# Altium PCB PCB2.PcbDoc
Units mm, origin at the board's own origin, x right, y up, seen from the top; angles counter-clockwise.
Board outline 70 x 58 mm, 2 copper layers (Top Layer, Bottom Layer); 36 components, 26 nets, 142 pads, 138 vias.
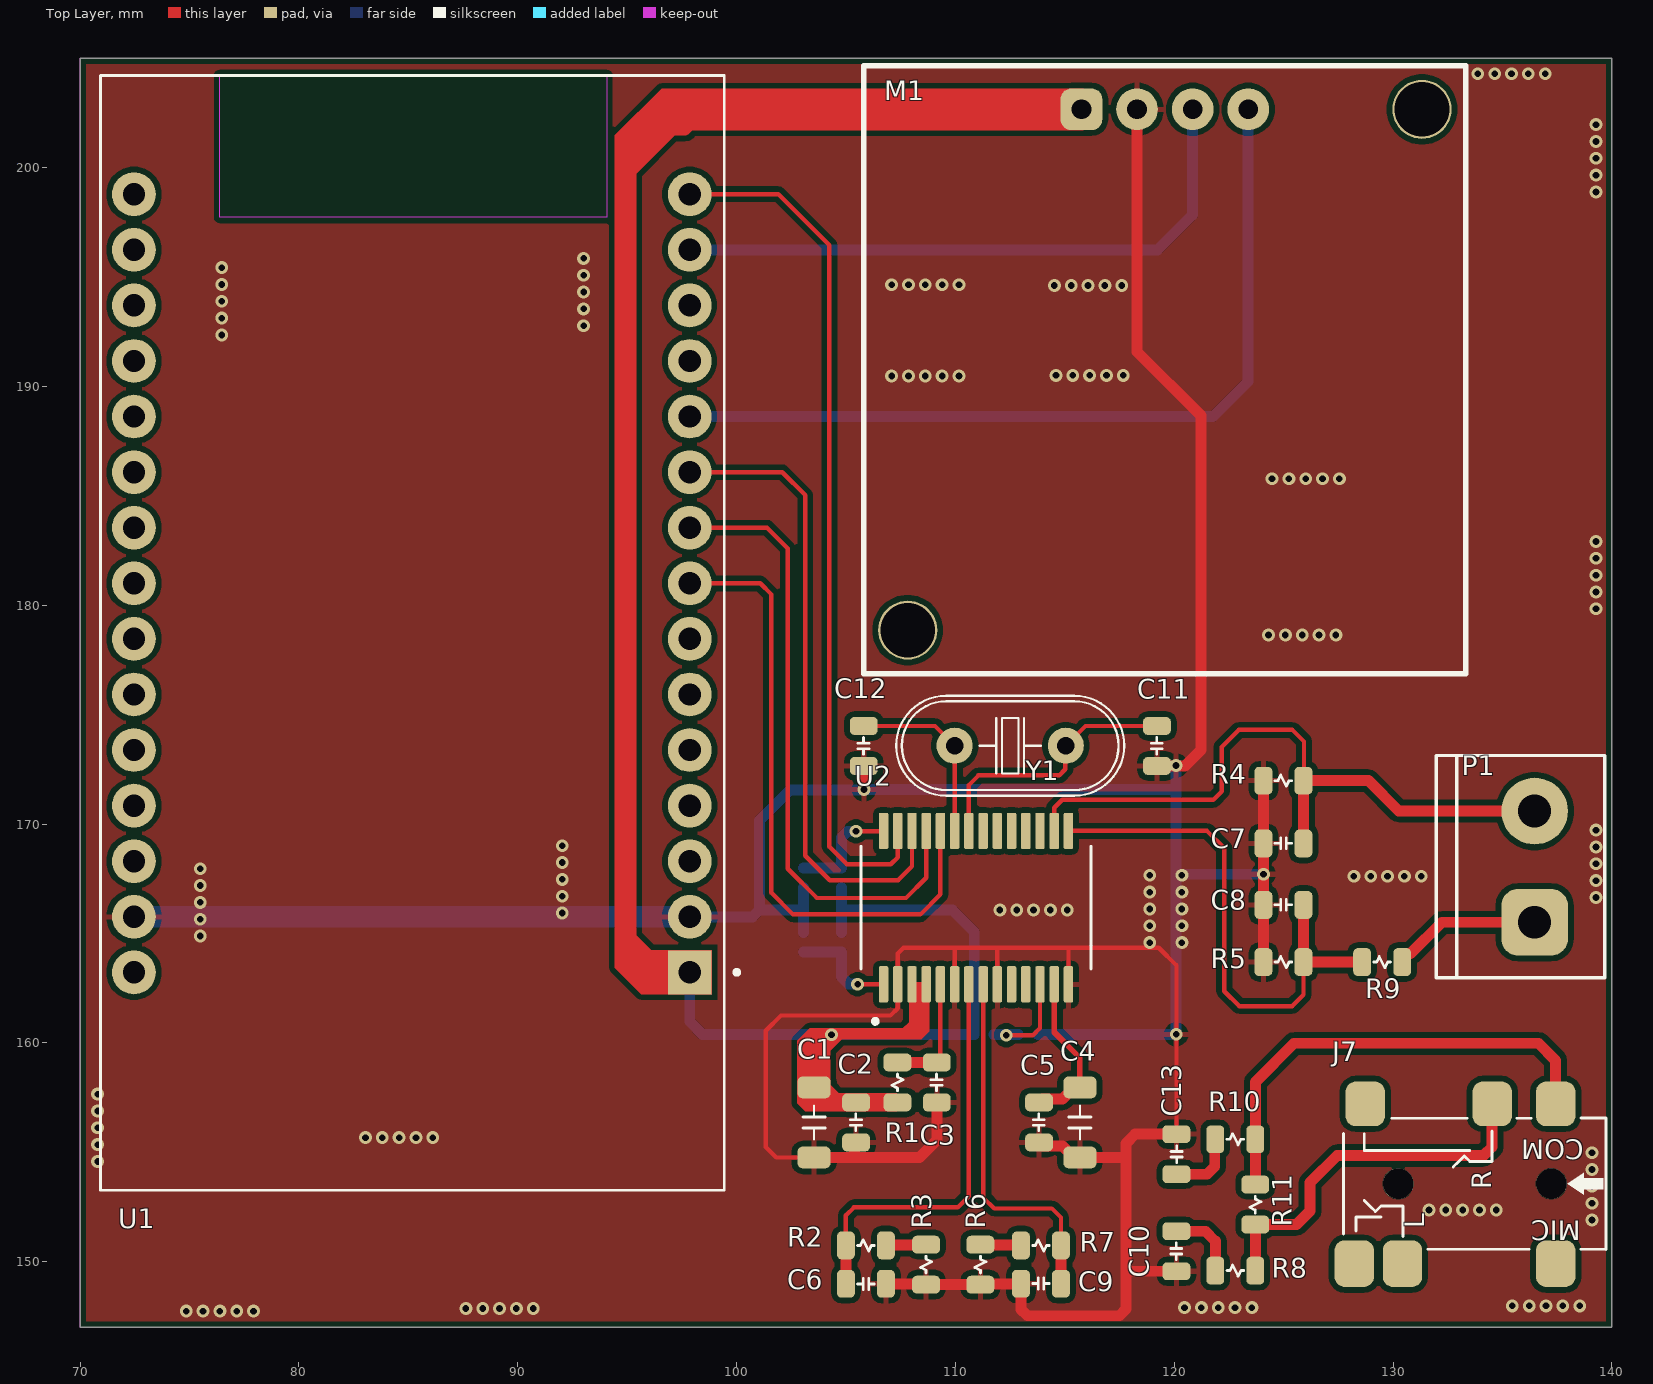
[diagram p0: Top Layer view]
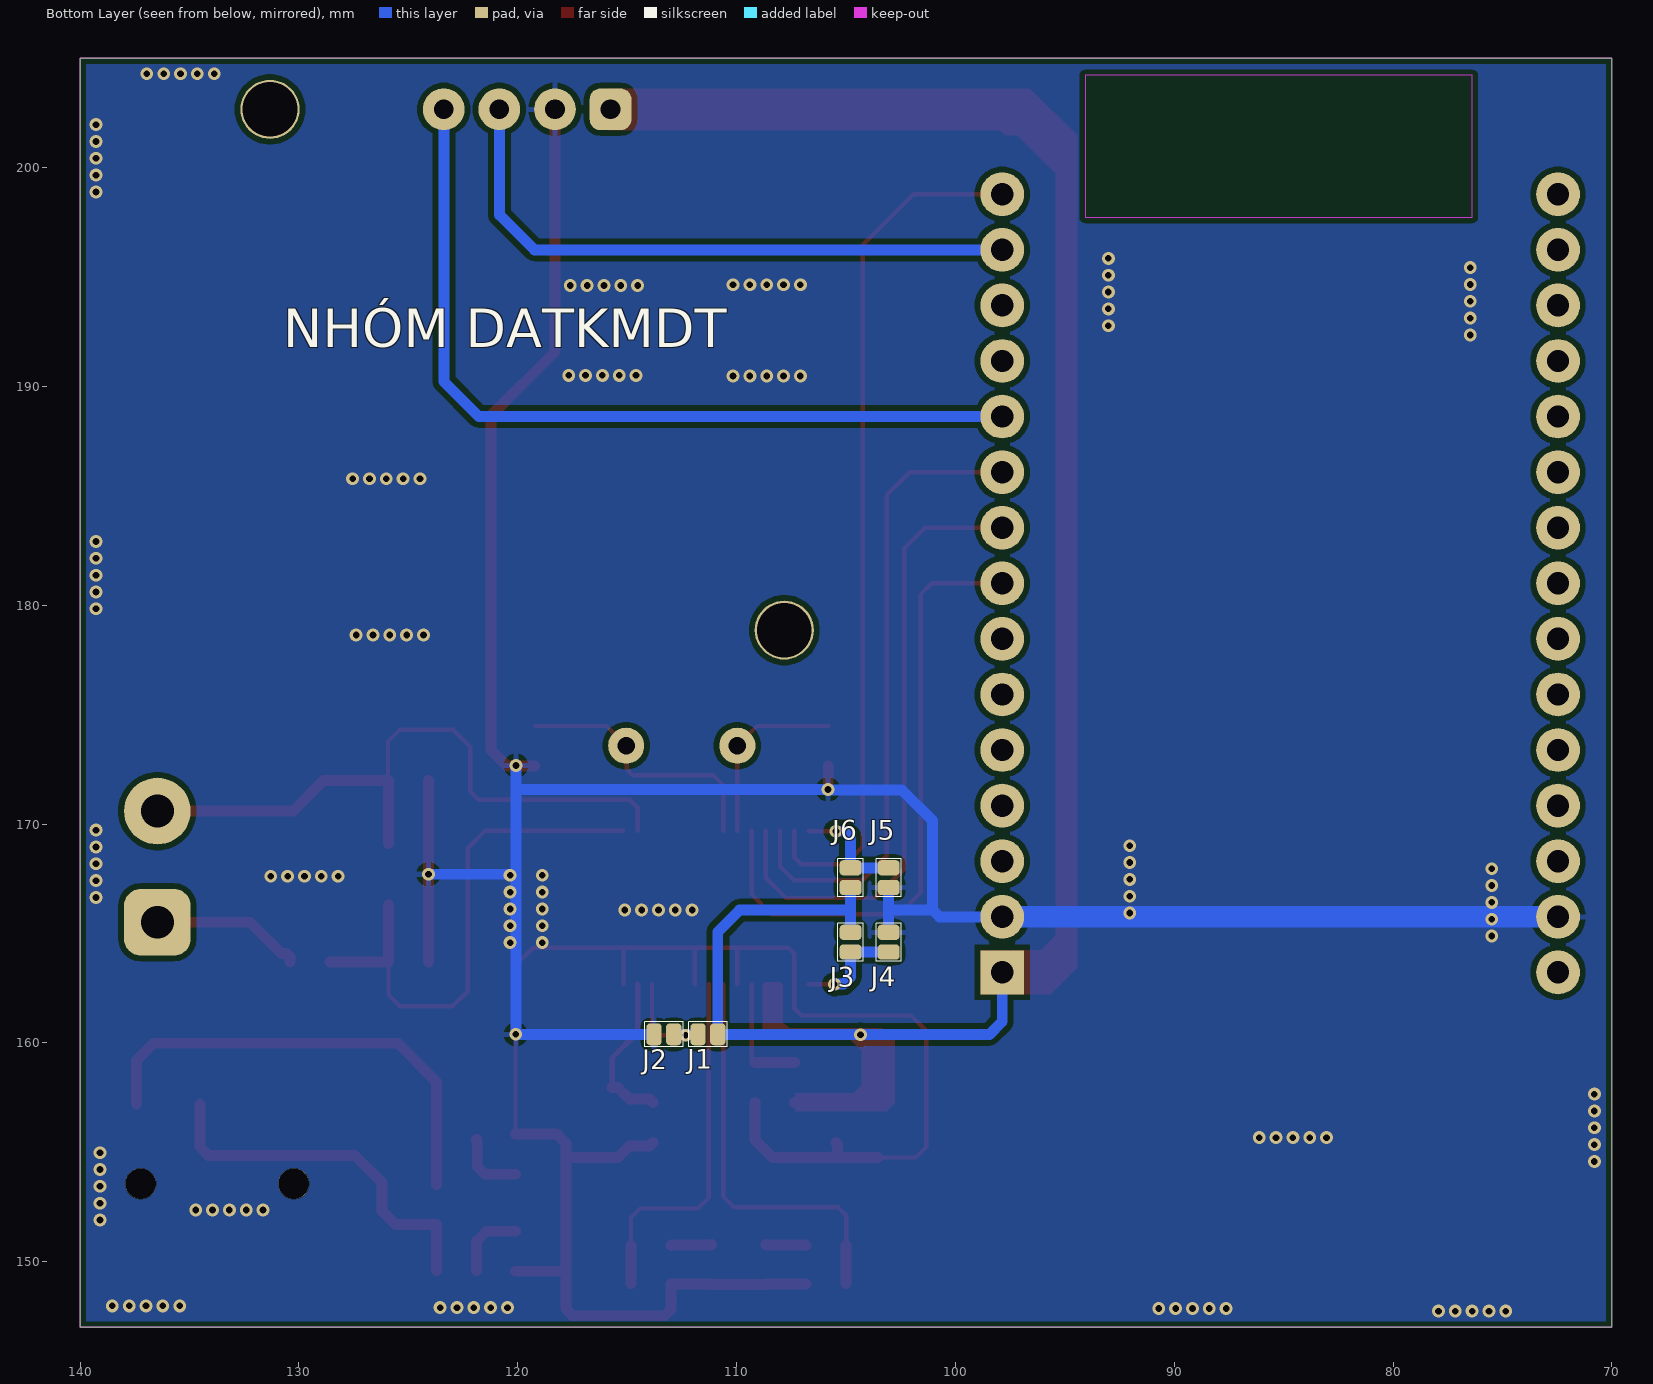
[diagram p1: Bottom Layer view, seen from below]
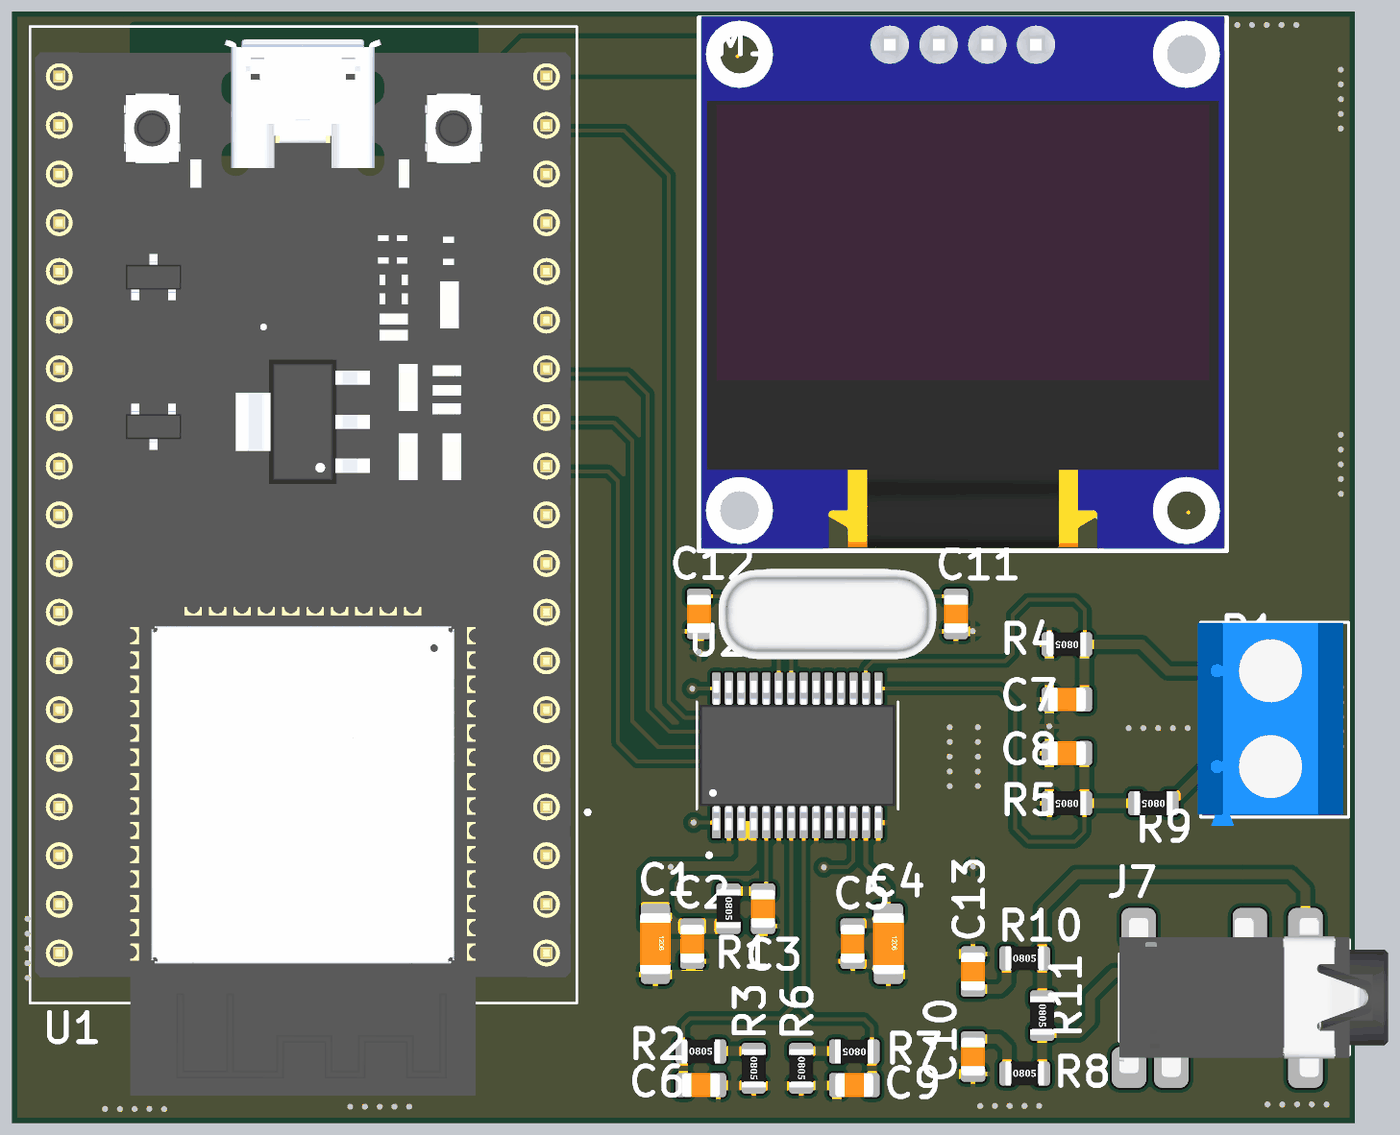
[diagram p2: 3D render of the assembled board from above, using the file's embedded part models]

## Layer stack, top to bottom
Top Solder: solder mask 0.0102, Solder Resist, Dk 3.5
Top Layer: signal copper 0.0356
Dielectric 1: dielectric 0.32, FR-4, Dk 4.8
Bottom Layer: signal copper 0.0356
Bottom Solder: solder mask 0.0102, Solder Resist, Dk 3.5

## Board outline
70,147 140,147 140,205 72,205 71.999,205.001 69.999,205.001 70,205

## Design rules (kind name [scope] priority, off if disabled: settings)
Clearance [All] p1: gap=0.254 ignorepadtopadclearanceinfootprint=FALSE except(0: Arc-Hole Track-Hole SMDPad-Hole THPad-Hole Via-Hole Fill-Hole Poly-Hole Region-Hole Text-Hole)
PolygonConnect [All] p1: connectstyle=Relief reliefconductorwidth=0.254 reliefentries=4 polygonreliefangle="90 Angle" airgapwidth=0.254
RoutingVias [All] p1: holewidth=0.711 width=1.27 viastyle="Through Hole" minholewidth=0.711 minwidth=1.27 maxholewidth=0.711 maxwidth=1.27
SolderMaskExpansion [All] p1: expansion=0.102 istentingtop=FALSE
Width [All] p1: maxlimit=1 minlimit=0.2 preferedwidth=0.5
30 further rules are at their usual default settings.

## Components (designator, comment, footprint, x,y, rotation, side; value= is the part's Value field where it differs from the comment)
C1 "106" CAP-1206 103.54,156.361 r270 top value="106/10V 1206"
C2 "104" CAP-0805 105.46,156.361 r270 top value=C0805
C3 "104" CAP-0805 109.15,158.19 r270 top value=C0805
C4 "106" CAP-1206 115.69,156.361 r270 top value="106/10V 1206"
C5 "104" CAP-0805 113.82,156.361 r270 top value=C0805
C6 "33nF" CAP-0805 105.91,148.99 r0 top value=C0805
C7 "33nF" CAP-0805 124.99,169.11 r180 top value=C0805
C8 "33nF" CAP-0805 124.99,166.3 r180 top value=C0805
C9 "33nF" CAP-0805 113.91,148.99 r180 top value=C0805
C10 "330nF" CAP-0805 120.1,150.476 r270 top value=C0805
C11 "27pF" CAP-0805 119.21,173.566 r270 top value=C0805
C12 "27pF" CAP-0805 105.81,173.566 r270 top value=C0805
C13 "330nF" CAP-0805 120.1,154.91 r90 top value=C0805
J1 "PAD_CD" PAD_CD 111.76,160.39 r180 bottom
J2 "PAD_CD" PAD_CD 113.77,160.39 r180 bottom
J3 "PAD_CD" PAD_CD 104.791,164.15 r90 bottom
J4 "PAD_CD" PAD_CD 103.05,165.048 r270 bottom
J5 "PAD_CD" PAD_CD 103.052,167.098 r90 bottom
J6 "PAD_CD" PAD_CD 104.791,167.098 r90 bottom
J7 "PJ342" PJ-342 139.73,153.56 r90 top
M1 "OLED" "OLED 0.96 I2C" 119.57,190.76 r0 top
P1 "KF301-2P" KF301-2P 136.47,168.05 r90 top
R1 "0R" R-0805 107.35,158.19 r270 top value="R 0805"
R2 "1K" R-0805 105.91,150.74 r0 top value="R 0805"
R3 "2.4R" R-0805 108.66,149.864 r270 top value="R 0805"
R4 "1K" R-0805 124.99,171.98 r180 top value="R 0805"
R5 "1K" R-0805 124.99,163.69 r180 top value="R 0805"
R6 "2.4R" R-0805 111.14,149.864 r270 top value="R 0805"
R7 "1K" R-0805 113.91,150.74 r180 top value="R 0805"
R8 "100R" R-0805 122.79,149.59 r0 top value="R 0805"
R9 "100K" R-0805 129.5,163.69 r180 top value="R 0805"
R10 "100R" R-0805 122.79,155.59 r0 top value="R 0805"
R11 "1M" R-0805 123.704,152.61 r270 top value="R 0805"
U1 "DEVKIT_V1_ESP32-WROOM-32" MODULE_DEVKIT_V1_ESP32-WROOM-32 85.16,178.735 r180 top
U2 "ATM90E26-YU-R" SOP65P780X200-28N 110.94,166.18 r90 top
Y1 "8.192MHz" CRYSTAL-49S 112.505,173.58 r180 top value="Crystal 49S"

## Footprints (in the part's own frame and the unit in brackets; to place one, negate y for a bottom-side part, rotate by r counter-clockwise, add the part's x,y. Pads: shape width x height; smd on the part's side, far side on the other; paste and mask are expansions set on the pad)
CAP-0805 [mil] "SMDCHIP - Size"
  rrect50% 32x50 smd: 1(-36,0) 2(36,0)
  silkscreen extent -15,-10 15,10, body extent -39,-25 39,25, height 31
CAP-1206 [mm]
  rrect50% 1x1.524 smd: 1(-1.6,0) 2(1.6,0)
  silkscreen extent -0.76,-0.51 0.76,0.51, body extent -1.6,-0.8 1.6,0.8, height 1
CRYSTAL-49S [mil]
  round 65 hole 31.5: 1(-100,0) 2(100,0)
  silkscreen extent -205,-90 205,90, body extent -223,-90 223,93, height 138
KF301-2P [mil]
  rrect50% 120x120 hole 59.06: 1(-100,0)
  round 120 hole 59.06: 2(100,0)
  silkscreen extent -200,-126 200,177, body extent -218,-116 199,184, height 399
MODULE_DEVKIT_V1_ESP32-WROOM-32 [mm]
  rect 2x2 / inner round 2 / far side rect 2x2 hole 1.02 mask+0.102: 1(-12.7,15.515)
  round 2 hole 1.02 mask+0.102: 2(-12.7,12.975) 3(-12.7,10.435) 4(-12.7,7.895) 5(-12.7,5.355) 6(-12.7,2.815) 7(-12.7,0.275) 8(-12.7,-2.265) 9(-12.7,-4.805) 10(-12.7,-7.345) 11(-12.7,-9.885) 12(-12.7,-12.425) 13(-12.7,-14.965) 14(-12.7,-17.505) 15(-12.7,-20.045) 16(12.7,-20.045) 17(12.7,-17.505) 18(12.7,-14.965) 19(12.7,-12.425) 20(12.7,-9.885) 21(12.7,-7.345) 22(12.7,-4.805) 23(12.7,-2.265) 24(12.7,0.275) 25(12.7,2.815) 26(12.7,5.355) 27(12.7,7.895) 28(12.7,10.435) 29(12.7,12.975) 30(12.7,15.515)
  round 0 all layers, no hole mask+0: ""(-12.28,23.475) ""(-12.28,-23.475) ""(12.23,23.475) ""(12.23,-23.475)
  Keep-Out Layer region: 8.78,-25.475 -8.91,-25.475 -8.91,-18.985 8.78,-18.985
  Keep-Out Layer region: 8.78,-25.475 -8.91,-25.475 -8.91,-18.985 8.78,-18.985
  silkscreen extent -14.95,-25.48 14.23,25.48, body extent -13.97,-24.8 13.97,30.3, height 6.69
"OLED 0.96 I2C" [mm]
  rrect50% 1.905x1.905 hole 0.9: 1(-3.81,11.9)
  round 1.905 hole 0.9: 2(-1.27,11.9) 3(1.27,11.9) 4(3.81,11.9)
  round 2.7 hole 2.5: MH(-11.75,-11.9) MH(11.75,11.9)
  round 0 all layers, no hole: MH(-11.75,11.9) MH(11.75,-11.9)
  silkscreen extent -13.75,-13.9 13.75,13.9, body extent -13.65,-13.8 13.65,14, height 14.1
PAD_CD [mm]
  rrect50% 0.7x1 smd: 1(-0.001,-0.001) 2(0.9,-0.001)
  silkscreen extent -0.43,-0.58 1.32,0.58
PJ-342 [mm]
  round 1.4 hole 1.4 unplated: 0(0,9.5) 0(0,2.5)
  rrect50% 2.032x1.8 smd: 1(3.65,2.3) 3(3.65,5.2) 5(3.65,11)
  rrect50% 2.134x1.8 smd: 2(-3.65,2.3) 4(-3.65,9.3) 6(-3.65,11.5)
  silkscreen extent -3,0 3,12, body extent -4.15,-2 4.15,12, height 4.92
R-0805 [mil] "smdchip size"
  rrect50% 32x50 smd: 1(-36,0) 2(36,0)
  silkscreen extent -15,-10 15,10, body extent -39,-25 39,25, height 20
SOP65P780X200-28N [mm]
  rrect30% 1.651x0.432 smd: 1(-3.505,4.225) 2(-3.505,3.575) 3(-3.505,2.925) 4(-3.505,2.275) 5(-3.505,1.625) 6(-3.505,0.975) 7(-3.505,0.325) 8(-3.505,-0.325) 9(-3.505,-0.975) 10(-3.505,-1.625) 11(-3.505,-2.275) 12(-3.505,-2.925) 13(-3.505,-3.575) 14(-3.505,-4.225) 15(3.505,-4.225) 16(3.505,-3.575) 17(3.505,-2.925) 18(3.505,-2.275) 19(3.505,-1.625) 20(3.505,-0.975) 21(3.505,-0.325) 22(3.505,0.325) 23(3.505,0.975) 24(3.505,1.625) 25(3.505,2.275) 26(3.505,2.925) 27(3.505,3.575) 28(3.505,4.225)
  silkscreen extent -5.3,-5.25 2.8,5.25, body extent -3.9,-5.1 3.9,5.1, height 2

## Part data
C1 C4: library part "CAP CER 1206 106 10V", Mounting_Type=Surface_Mount, SAPO_CODE=512040, SAPO_NAME="Tụ gốm 106 10V 1206 10uF"
C2 C3 C5 C6 C7 C8 C9 C10 C11 C12 C13: library part "CAP CER 0805", "*uF *V Ceramic Capacitor 0805 (2012 Metric)", ComponentLink1Description=Linhkienviet, ComponentLink1URL=Linhkienviet, Mounting_Type=Surface_Mount
J7: library part "PJ342-Phone Jack", Mounting_Type=Surface_Mount, Price=2000, SAPO_CODE=202870, SAPO_NAME="Jack Audio 3.5MM PJ-342 6P (SMD)"
M1: library part "OLED 0.96 I2C", ComponentLink1Description=Supplier, ComponentLink1URL=www.www.www, ComponentLink2Description=Document, ComponentLink2URL=www.www.wwww
R1 R2 R3 R4 R5 R6 R7 R8 R9 R10 R11: library part "R 0805", "No Solder Or Re-Calculated", Mounting_Type=Surface_Mount, Price=80, SAPO_NAME="Điện trở dán 0805 5％ - xxx"
U1: "WROOM-32 Development Board ESP32 ESP-32S WiFi Bluetooth Dev Module", Package=Package, Check_prices=https://www.snapeda.com/parts/DEVKIT%20V1%20ESP32-WROOM-32/Do+it/view-part/?ref=eda, MF="Do it", MP="DEVKIT V1 ESP32-WROOM-32", SnapEDA_Link=https://www.snapeda.com/parts/DEVKIT%20V1%20ESP32-WROOM-32/Do+it/view-part/?ref=snap
U2: "IC ENERGY METER 1.8V/3V 28SSOP", Package="SSOP-28 Microchip", Check_prices=https://www.snapeda.com/parts/ATM90E26-YU-R/Microchip/view-part/?ref=eda, MF=Microchip, MP=ATM90E26-YU-R, SnapEDA_Link=https://www.snapeda.com/parts/ATM90E26-YU-R/Microchip/view-part/?ref=snap
Y1: library part CRYSTAL-49S, "Crystal 49S Through Hole", Mounting_Type=Through_Hole
P1: Mounting_Type=Through_Hole, SAPO_CODE=205300, SAPO_NAME="Header KF301-2p 5.08mm chân tròn"

## Via types
v1: diameter 0.584, hole 0.305, Top Layer to Bottom Layer, tented both sides, 138 vias

## Nets (pads, with @x,y where several pads share a name; then routed paths per layer and width w, separated by ;. In a path a pad name is that pad's centre, name@x,y a point inside that pad or via, vN(x,y) a via of type N, cw(c..) or ccw(c..) an arc to the next point about the centre after c; other vN are vias at no path point)
CS: U1.8 U2.24 | length 29
  Top Layer w0.2: U1.8 101.08,181 101.59,180.49 101.59,166.86 102.58,165.87 108.4,165.87 109.315,166.785 U2.24
GND: C1.2 C2.2 C3.2 C4.2 C5.2 C6.2 C7.2 C8.2 C9.2 C10.2 C11.2 C12.2 C13.2 J2.1 J4.1 J5.1 M1.2 R3.2 R4.2 R5.2 R6.2 U1.2 U1.29 U2.2 U2.6 U2.9 U2.14 | length 201.3
  Top Layer w0.2: C1.2 101.809,154.761 101.33,155.24 101.33,160.55 102.03,161.25 107.03,161.25 107.365,161.585 U2.2 107.365,164.085 107.63,164.35 109.98,164.35 ; U2.6 109.965,164.335 109.98,164.35 ; U2.9 111.915,164.335 111.93,164.35 ; U2.14 115.165,164.35 ; C13.2 120.1,163.54 119.29,164.35 115.165,164.35 ; 109.98,164.35 111.93,164.35 ; 111.93,164.35 115.165,164.35
  Top Layer w0.5: C1.2 105.38,154.761 ; C2.2 105.38,155.367 105.38,154.761 ; C12.2 105.81,171.59 v1(105.82,171.58) ; C6.2 106.844,148.97 108.64,148.97 R3.2 R6.2 111.16,148.97 112.976,148.97 C9.2 112.996,147.822 113.288,147.53 117.49,147.53 117.79,147.83 117.79,149.561 ; C3.2 109.15,155.56 108.351,154.761 105.38,154.761 ; C5.2 113.976,155.29 114.899,155.29 115.428,154.761 C4.2 117.719,154.761 117.79,154.69 ; M1.2 118.3,191.58 121.22,188.66 121.22,173.38 120.492,172.652 C11.2 ; C10.2 117.809,149.561 117.79,149.58 117.79,154.69 ; C13.2 118.214,155.824 117.79,155.4 117.79,154.69 ; R5.2 C8.2 v1(124.076,167.705) C7.2 R4.2
  Bottom Layer w0.5: U1.2 100.73,165.76 101.05,166.08 ; J4.1 103.051,166.073 ; J5.1 103.051,166.073 ; v1@105.82,171.56 102.45,171.56 101.05,170.16 101.05,166.08 ; v1@105.824,171.584 119.994,171.584 120.08,171.498 v1(120.08,172.67) ; J2.1 120.089,160.389 v1(120.09,160.39) v1@120.09,167.71 ; 120.09,171.498 v1@120.09,167.71 ; v1(124.076,167.705) 120.095,167.705 v1@120.09,167.71 ; 101.05,166.08 103.044,166.08 103.051,166.073
  Bottom Layer w1: U1.29 U1.2
  other v1: 74.85,147.74 75.619,147.74 76.389,147.74 77.158,147.74 77.927,147.74 87.63,147.86 88.399,147.86 89.169,147.86 89.938,147.86 90.707,147.86 120.47,147.9 121.239,147.9 122.009,147.9 122.778,147.9 123.547,147.9 135.45,147.98 136.219,147.98 136.989,147.98 137.758,147.98 138.527,147.98 139.09,151.903 131.64,152.36 132.409,152.36 133.179,152.36 133.948,152.36 134.717,152.36 139.09,152.672 139.09,153.441 139.09,154.211 70.8,154.58 139.09,154.98 70.8,155.349 83.04,155.67 83.809,155.67 84.579,155.67 85.348,155.67 86.117,155.67 70.8,156.119 70.8,156.888 70.8,157.657 118.88,164.58 120.35,164.58 75.49,164.88 118.88,165.349 120.35,165.349 75.49,165.649 92.03,165.93 112.031,166.068 112.8,166.068 113.569,166.068 114.339,166.068 115.108,166.068 118.88,166.119 120.35,166.119 75.49,166.419 139.27,166.643 92.03,166.699 118.88,166.888 120.35,166.888 75.49,167.188 139.27,167.412 92.03,167.469 128.21,167.61 128.979,167.61 129.749,167.61 130.518,167.61 131.287,167.61 118.88,167.657 120.35,167.657 75.49,167.957 139.27,168.181 92.03,168.238 139.27,168.951 92.03,169.007 139.27,169.72 124.31,178.64 125.079,178.64 125.849,178.64 126.618,178.64 127.387,178.64 139.27,179.833 139.27,180.602 139.27,181.371 139.27,182.141 139.27,182.91 124.47,185.78 125.239,185.78 126.009,185.78 126.778,185.78 127.547,185.78 107.083,190.47 107.852,190.47 108.621,190.47 109.391,190.47 110.16,190.47 114.593,190.5 115.362,190.5 116.131,190.5 116.901,190.5 117.67,190.5 76.47,192.35 93.01,192.77 76.47,193.119 93.01,193.539 76.47,193.889 93.01,194.309 114.523,194.61 115.292,194.61 116.061,194.61 116.831,194.61 117.6,194.61 107.083,194.64 107.852,194.64 108.621,194.64 109.391,194.64 110.16,194.64 76.47,194.658 93.01,195.078 76.47,195.427 93.01,195.847 139.27,198.883 139.27,199.652 139.27,200.421 139.27,201.191 139.27,201.96 133.873,204.29 134.642,204.29 135.411,204.29 136.181,204.29 136.95,204.29
I1N: C10.1 R8.1 | length 3.3
  Top Layer w0.5: C10.1 121.42,151.39 121.876,150.934 R8.1
I1N_IN: J7.3 R8.2 R11.2 | length 17.1
  Top Layer w0.5: R8.2 R11.2 125.586,151.696 126.21,152.32 126.21,153.61 127.45,154.85 134.13,154.85 134.53,155.25 J7.3
I1P: C13.1 R10.1 | length 3.1
  Top Layer w0.5: C13.1 121.496,153.996 121.85,154.35 121.85,155.564 R10.1
I1P_IN: J7.1 R10.2 R11.1 | length 21.5
  Top Layer w0.5: R11.1 R10.2 123.704,158.204 125.48,159.98 136.65,159.98 137.43,159.2 J7.1
I2N: C9.1 R7.1 U2.8 | length 16.7
  Top Layer w0.2: U2.8 111.265,152.935 111.77,152.43 114.41,152.43 114.824,152.016 R7.1
  Top Layer w0.5: C9.1 R7.1
I2N_IN: R6.1 R7.2 | length 1.9
  Top Layer w0.5: R6.1 111.159,150.759 112.976,150.759 R7.2
I2P: C6.1 R2.1 U2.7 | length 18.8
  Top Layer w0.2: R2.1 104.996,152.116 105.36,152.48 110.11,152.48 110.615,152.985 U2.7
  Top Layer w0.5: C6.1 R2.1
I2P_IN: R2.2 R3.1 | length 1.9
  Top Layer w0.5: R2.2 106.844,150.759 108.641,150.759 R3.1
NetC3_1: C3.1 R1.1 U2.5 | length 5.4
  Top Layer w0.2: C3.1 109.315,159.269 U2.5
  Top Layer w0.5: R1.1 C3.1
NetJ3_1: J3.1 J4.2 U2.1 | length 4.9
  Top Layer w0.2: v1(105.53,162.68) 106.71,162.68 U2.1
  Bottom Layer w0.5: J4.2 J3.1@104.79,164.149 ; J3.1 104.79,163.01 105.12,162.68 v1(105.53,162.68)
NetJ5_2: J5.2 J6.2 U2.28 | length 5.2
  Top Layer w0.2: v1(105.46,169.67) 106.7,169.67 U2.28
  Bottom Layer w0.5: J5.2 J6.2 104.79,169.39 105.07,169.67 v1(105.46,169.67)
NetP1_1: P1.1 R9.1 | length 6.9
  Top Layer w0.5: R9.1 130.414,163.919 130.571,164.075 130.799,164.075 132.234,165.51 P1.1
OSCI: C11.1 U2.22 Y1.1 | length 12.6
  Top Layer w0.2: U2.22 110.615,171.785 111.05,172.22 114.74,172.22 115.02,172.5 Y1.1@115.02,173.555 ; Y1.1@114.914,173.454 Y1.1@115.04,173.58 ; Y1.1 115.946,174.481 C11.1
OSCO: C12.1 U2.23 Y1.2 | length 8.4
  Top Layer w0.2: C12.1 109.064,174.481 Y1.2 U2.23
SCK: M1.3 U1.14 | length 28.5
  Bottom Layer w0.5: U1.14 119.24,196.24 120.84,197.84 M1.3
SCLK: U1.9 U2.25 | length 28.9
  Top Layer w0.2: U1.9 101.39,183.54 102.34,182.59 102.34,167.95 103.67,166.62 107.74,166.62 108.665,167.545 U2.25
SDA: M1.4 U1.11 | length 38.6
  Bottom Layer w0.5: U1.11 121.78,188.62 123.38,190.22 M1.4
SDI: U1.15 U2.27 | length 39.6
  Top Layer w0.2: U1.15 101.91,198.78 104.24,196.45 104.24,168.96 105.04,168.16 107.05,168.16 107.365,168.475 U2.27
SDO: U1.10 U2.26 | length 29.4
  Top Layer w0.2: U1.10 102.09,186.08 103.14,185.03 103.14,168.55 104.26,167.43 107.38,167.43 108.015,168.065 U2.26
USEL: J1.1 J2.2 U2.12 | length 4.8
  Top Layer w0.2: v1(112.32,160.35) 113.54,160.35 113.865,160.675 U2.12
  Bottom Layer w0.5: J1.1 J2.2
VCC_3V3: C1.1 C2.1 J1.2 J3.2 J6.1 M1.1 R1.2 U1.1 U2.3 U2.4 | length 103.9
  Top Layer w0.2: C1.1 103.54,159.57 v1(104.34,160.37) 108.17,160.37 108.665,160.865 U2.4 U2.3
  Top Layer w0.5: U1.1 95.77,163.22 95.02,163.97 95.02,200.11 96.89,201.98 96.957,201.98 97.231,201.706 97.649,201.706 98.023,202.08 111.96,202.08 112.54,202.66 M1.1 ; C1.1 103.802,157.961 104.052,157.711 104.052,157.568 104.345,157.276 C2.1 R1.2
  Bottom Layer w0.5: U1.1 97.86,160.97 98.441,160.389 J1.2 110.86,165.07 109.856,166.074 104.79,166.074 ; J3.2 104.79,166.074 ; J6.1 104.79,166.074
VN: C8.1 R5.1 R9.2 U2.15 | length 24.9
  Top Layer w0.2: U2.15 121.495,169.685 122.29,168.89 122.29,162.36 122.97,161.68 125.39,161.68 125.904,162.194 R5.1
  Top Layer w0.5: C8.1 R5.1 R9.2
VP: C7.1 P1.2 R4.1 U2.16 | length 31.2
  Top Layer w0.2: U2.16 114.515,170.745 114.88,171.11 121.79,171.11 122.17,171.49 122.17,173.52 122.95,174.3 125.4,174.3 125.93,173.77 125.93,172.006 R4.1
  Top Layer w0.5: C7.1 R4.1 128.87,171.98 130.26,170.59 P1.2
VREF: C4.1 C5.1 U2.13 | length 7.4
  Top Layer w0.254: U2.13 114.515,160.485 115.69,159.31 C4.1
  Top Layer w0.5: C5.1 113.976,157.432 114.899,157.432 115.428,157.961 C4.1
pads on no net: J7.0 J7.2 J7.4 J7.5 J7.6 M1.MH U1. U1.3 U1.4 U1.5 U1.6 U1.7 U1.12 U1.13 U1.16 U1.17 U1.18 U1.19 U1.20 U1.21 U1.22 U1.23 U1.24 U1.25 U1.26 U1.27 U1.28 U1.30 U2.10 U2.11 U2.17 U2.18 U2.19 U2.20 U2.21

## Polygon pours and split planes (outlines as drawn)
GND on Top Layer "NONET_L-01_P-001" (solid, pour order 0): 70,205 140,205 140,147 70,147
GND on Bottom Layer "NONET_L-01_P-001" (solid, pour order 2): 70,205 140,205 140,147 70,147

## Keep-outs
Keep-Out Layer:
  lines w0.051: 69.999,205.001 71.999,205.001 72,205 140,205 140,147 70,147 70,205 69.999,205.001

## Other copper
Top Layer:
  region net VCC_3V3: 108.811,160.531 108.44,160.16 104.8,160.16 104.27,159.63 104.27,158.08 104.66,157.69 107.33,157.69 107.33,156.87 103.14,156.87 102.78,157.23 102.78,160.1 103.34,160.66 107.6,160.66 107.88,160.94 107.88,162.67 108.811,162.67
  region net VCC_3V3: 115.84,201.71 112.43,201.71 97.4,201.71 95.41,199.72 95.41,164.92 96.11,164.22 98.86,164.22 98.86,162.23 95.64,162.23 94.44,163.43 94.44,201.47 96.57,203.6 115.84,203.6

## Silkscreen, mask and mechanical layers (free items; w line width, h text height)
Bottom Overlay:
  text "NHÓM DATKMDT" at 130.713,191.208 h3

## Text inside footprints (layer, text, board x,y; h text height)
J7: Top Overlay "COM" at 138.714,155.86 h1.52 r180; Top Overlay "MIC" at 138.587,152.163 h1.52 r180; Top Overlay "L" at 131.729,151.528 h1.52 r90; Top Overlay "R" at 134.777,153.306 h1.52 r90; Mechanical 15 "LEFT" at 130.713,151.147 h0.76 r90; Mechanical 15 "COM" at 137.698,154.576 h0.76 r90; Mechanical 15 "LEFT" at 143.54,152.835 h0.76 r90; Mechanical 15 "RIGHT" at 145.699,152.608 h0.76 r90; Mechanical 15 "MIC" at 148.366,153.015 h0.76 r90; Mechanical 15 "COM" at 151.16,152.906 h0.76 r90; Mechanical 15 "MIC" at 137.698,151.274 h0.76 r90; Mechanical 15 "RIGHT" at 134.777,154.068 h0.76 r90; Mechanical 15 "PCB Milling" at 141.635,151.782 h1.02 r90
M1: Mechanical 15 "SDA" at 123.813,198.649 h1.52 r90; Mechanical 15 "SCL" at 121.273,198.649 h1.52 r90; Mechanical 15 "GND" at 118.733,198.647 h1.52 r90; Mechanical 15 "VCC" at 116.193,198.647 h1.52 r90